# Altium PCB HUMI.PcbDoc
Units mm, origin at the board's own origin, x right, y up, seen from the top; angles counter-clockwise.
Board outline 108 x 64 mm, 2 copper layers (Top Layer, Bottom Layer), stack 1.571 mm thick; 38 components, 37 nets, 146 pads, 0 vias.
Unrouted connection lines stored in the file: 10.
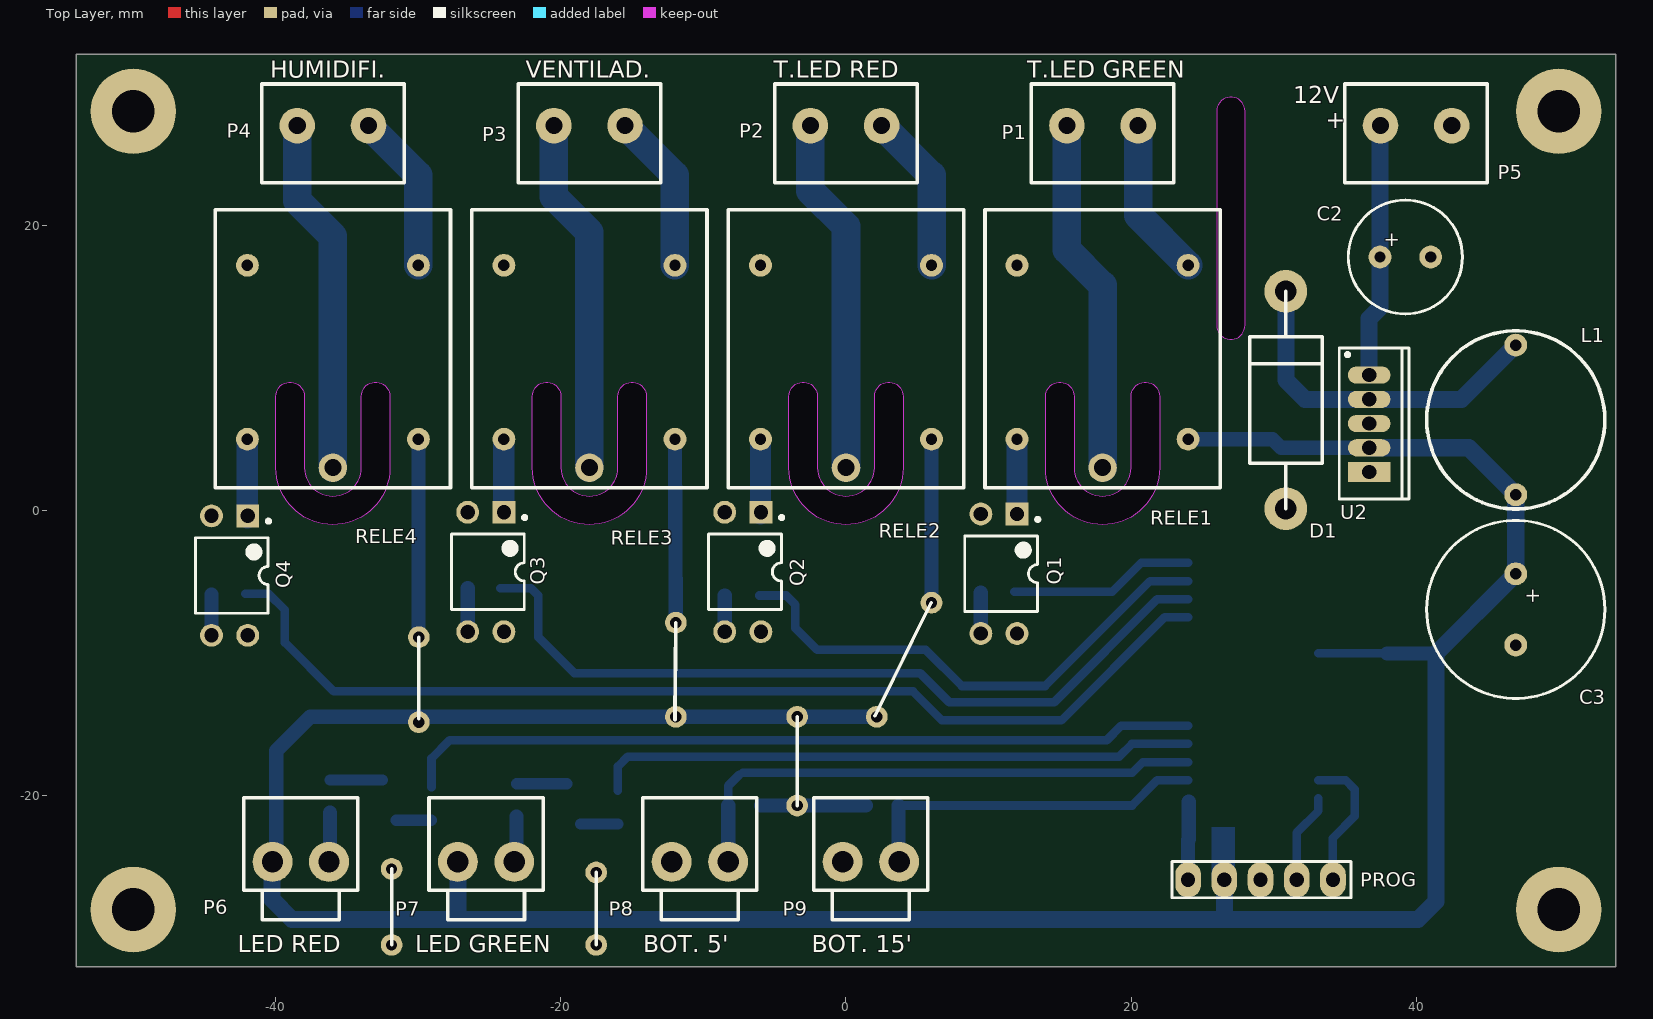
[diagram p0: Top Layer view]
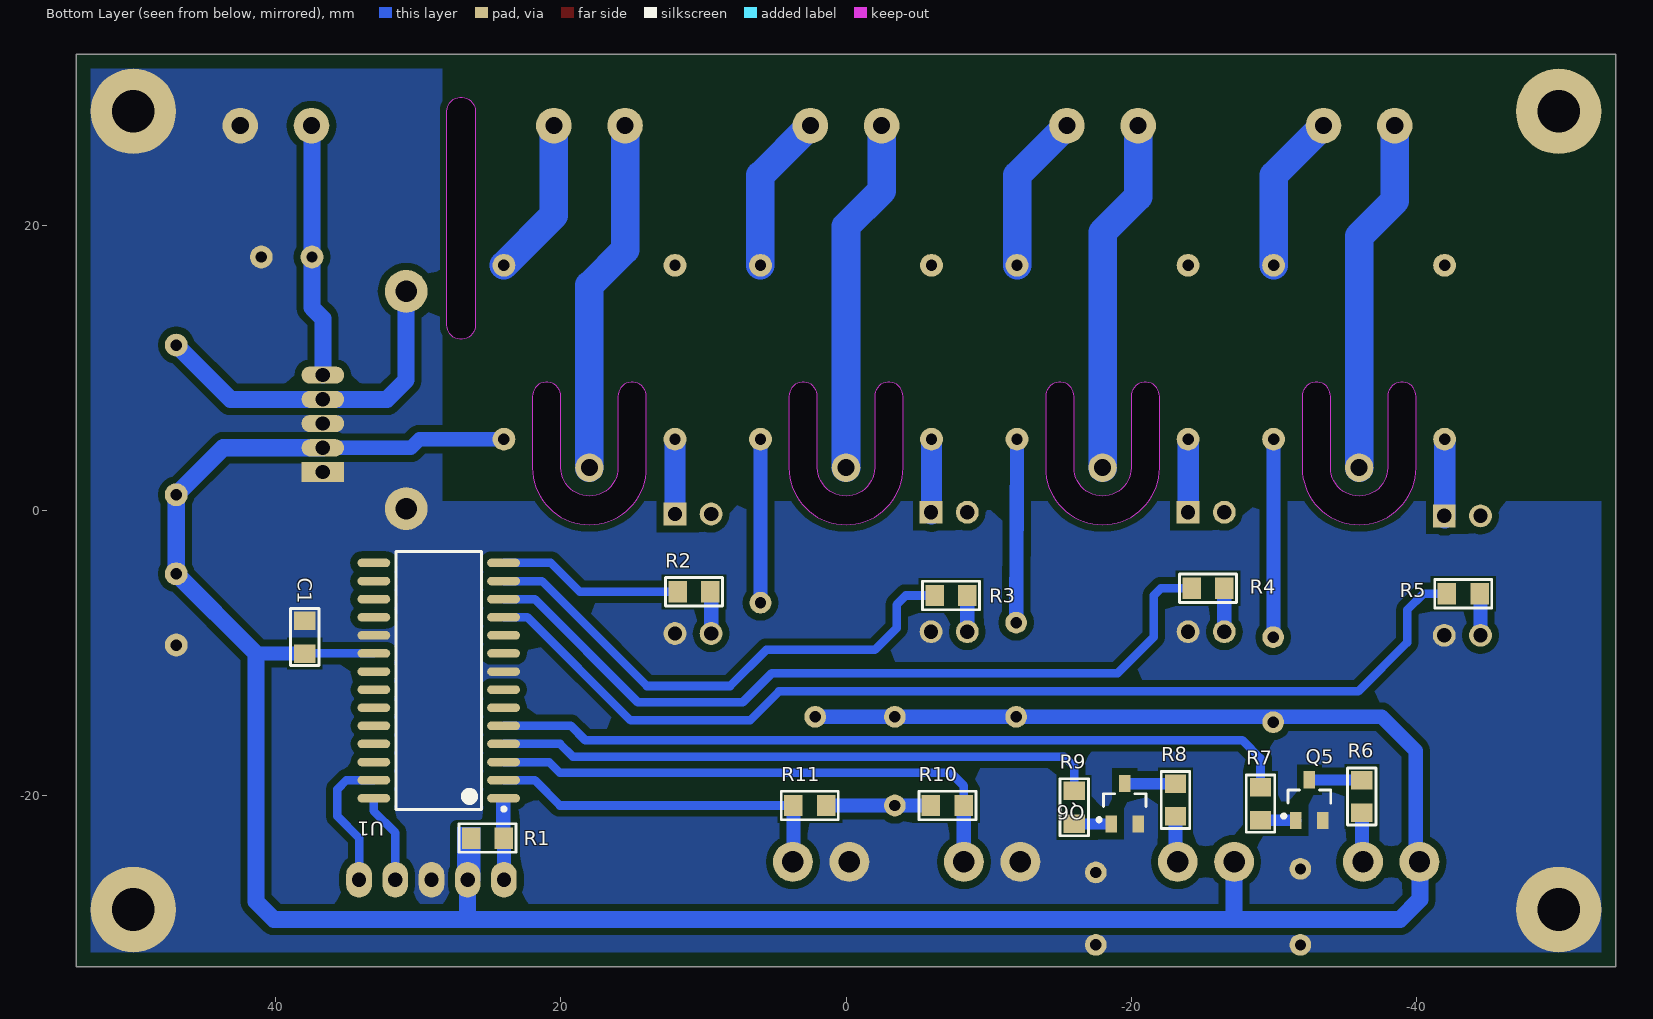
[diagram p1: Bottom Layer view, seen from below]
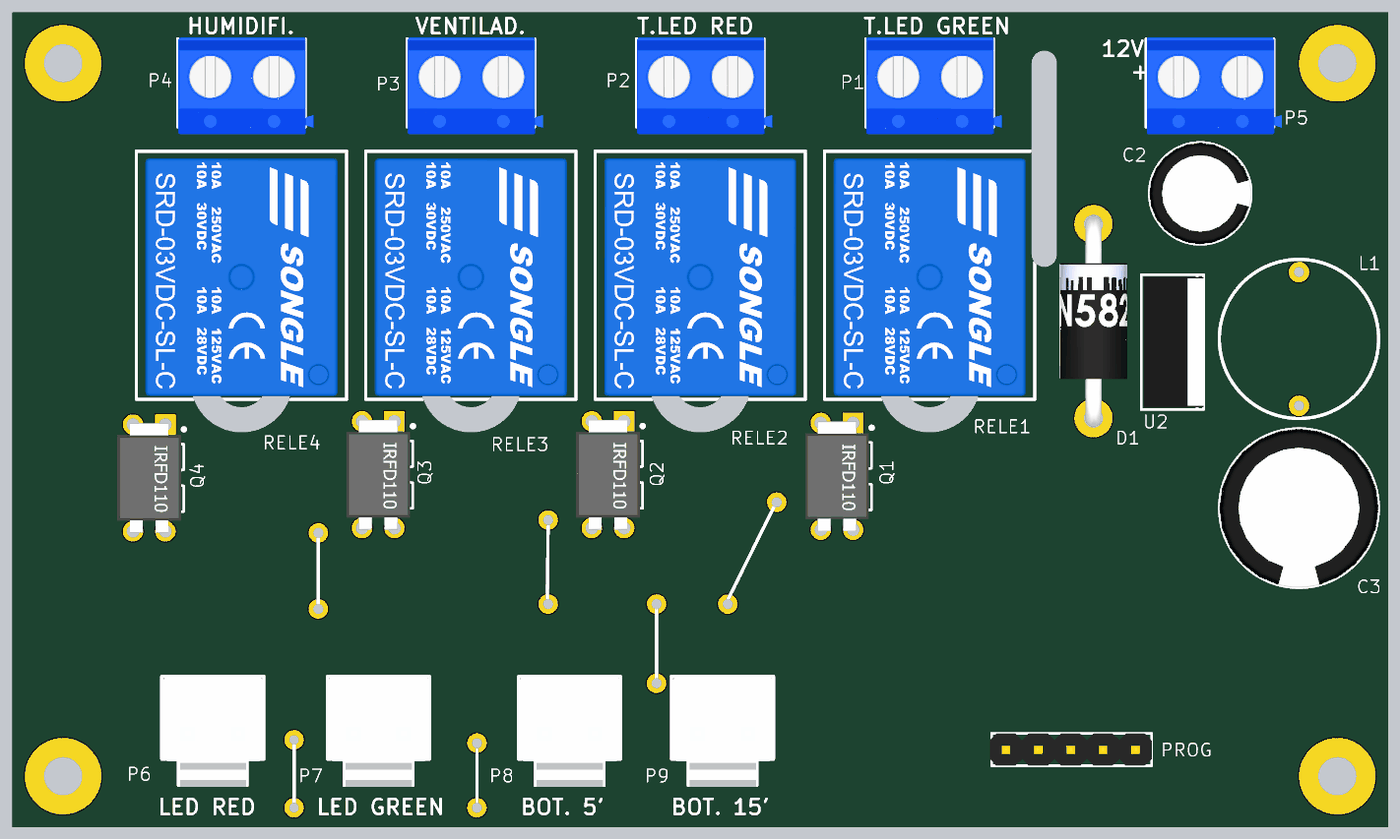
[diagram p2: 3D render of the assembled board from above, using the file's embedded part models]
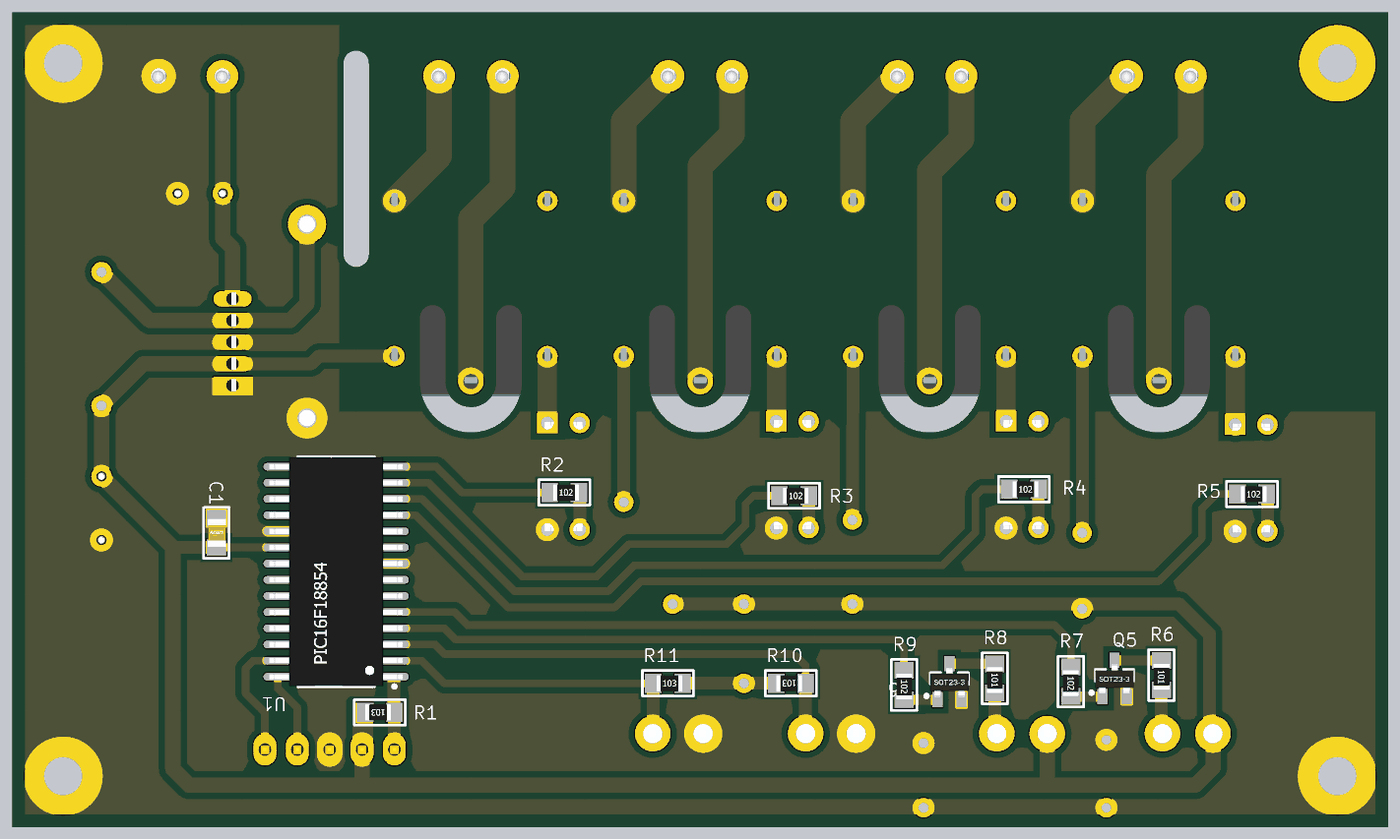
[diagram p3: 3D render of the assembled board from below, using the file's embedded part models]

## Layer stack, top to bottom
Top Solder: solder mask 0.0102, Solder Resist, Dk 3.5
Top Layer: signal copper 0.0356
Dielectric 1: dielectric 1.5, FR-4, Dk 4.8
Bottom Layer: signal copper 0.0356
Bottom Solder: solder mask 0.0102, Solder Resist, Dk 3.5

## Board outline
-54,-32 54,-32 54,32 -54,32
cut-out: 16,3 ccw(c18,3) 20,3 20,8 cw(c21,8) 22,8 22,3 cw(c18,3) 14,3 14,8 cw(c15,8) 16,8
cut-out: -2,3 ccw(c0,3) 2,3 2,8 cw(c3,8) 4,8 4,3 cw(c0,3) -4,3 -4,8 cw(c-3,8) -2,8
cut-out: -20,3 ccw(c-18,3) -16,3 -16,8 cw(c-15,8) -14,8 -14,3 cw(c-18,3) -22,3 -22,8 cw(c-21,8) -20,8
cut-out: -38,3 ccw(c-36,3) -34,3 -34,8 cw(c-33,8) -32,8 -32,3 cw(c-36,3) -40,3 -40,8 cw(c-39,8) -38,8
cut-out: 26,13 ccw(c27,13) 28,13 28,28 ccw(c27,28) 26,28

## Design rules (kind name [scope] priority, off if disabled: settings)
Clearance [All] p1: gap=0.5 ignorepadtopadclearanceinfootprint=FALSE except(0: Arc-Hole Track-Hole SMDPad-Hole THPad-Hole Via-Hole Fill-Hole Poly-Hole Region-Hole Text-Hole)
PlaneConnect [All] p1: planeconnectstyle=Direct reliefexpansion=0.508 reliefentries=4 reliefconductorwidth=0.254 reliefairgap=0.254
PolygonConnect [All] p1: connectstyle=Direct reliefconductorwidth=0.254 reliefentries=4 polygonreliefangle="90 Angle" airgapwidth=0.254
RoomDefinition HUMI [InComponentClass('HUMI')] p1: confinementstyle=ConfineIn formatcopy=TRUE lockcomponents=FALSE outline 77.343,-46.863 401.066,-46.863 401.066,-24.13 77.343,-24.13
RoutingVias [All] p1: holewidth=0.711 width=1.27 viastyle="Through Hole" minholewidth=0.711 minwidth=1.27 maxholewidth=0.711 maxwidth=1.27
SolderMaskExpansion [All] p1: expansion=0.102
Width [All] p1: maxlimit=3 minlimit=0.6 preferedwidth=0.6
29 further rules are at their usual default settings.

## Components (designator, comment, footprint, x,y, rotation, side; value= is the part's Value field where it differs from the comment)
C1 "100NF" CAP.SMD.0805 37.973,-8.89 r270 bottom
C2 "100UFX35V" CAP-ELEC-8X11 39.243,17.78 r0 top
C3 "1000UFX25V" CAP-ELEC-12.5X20 46.99,-6.945 r270 top
D1 "1N5822" "Diode 1N5822" 30.861,7.747 r90 top
L1 "330UHY" "Inductor Radial DR1213" 46.99,6.35 r90 top
P1 "BORNE 2P P=5MM 1.5MM2 15A AZUL XY301V-2P" CON-BOR-X2-5MM 18,27 r180 top
P2 "BORNE 2P P=5MM 1.5MM2 15A AZUL XY301V-2P" CON-BOR-X2-5MM 0,27 r180 top
P3 "BORNE 2P P=5MM 1.5MM2 15A AZUL XY301V-2P" CON-BOR-X2-5MM -18,27 r180 top
P4 "BORNE 2P P=5MM 1.5MM2 15A AZUL XY301V-2P" CON-BOR-X2-5MM -36,27 r180 top
P5 "BORNE 2P P=5MM 1.5MM2 15A AZUL XY301V-2P" CON-BOR-X2-5MM 40,27 r180 top
P6 "CONECTOR PWXXS MA-02 VERTICAL P=3.96MM PW02S" "CONECTOR PWXXS MA-02 VERTICAL P=3.96MM" -38.254,-24.659 r180 top
P7 "CONECTOR PWXXS MA-02 VERTICAL P=3.96MM PW02S" "CONECTOR PWXXS MA-02 VERTICAL P=3.96MM" -25.254,-24.659 r180 top
P8 "CONECTOR PWXXS MA-02 VERTICAL P=3.96MM PW02S" "CONECTOR PWXXS MA-02 VERTICAL P=3.96MM" -10.254,-24.659 r180 top
P9 "CONECTOR PWXXS MA-02 VERTICAL P=3.96MM PW02S" "CONECTOR PWXXS MA-02 VERTICAL P=3.96MM" 1.746,-24.659 r180 top
PROG "In-Serial Circuit Programmer Header" "PIC ICSP" 29.083,-25.908 r0 top
Q1 "Transistor MOSFET N IRFD110" TRA-IRFD110 10.731,-4.445 r270 top
Q2 "Transistor MOSFET N IRFD110" TRA-IRFD110 -7.239,-4.318 r270 top
Q3 "Transistor MOSFET N IRFD110" TRA-IRFD110 -25.273,-4.318 r270 top
Q4 "Transistor MOSFET N IRFD110" TRA-IRFD110 -43.244,-4.572 r270 top
Q5 "BC817-40 TRA.NPN 45V0.5A 0.25W SOT23" NPN.SMD.SOT23 -32.512,-20.32 r90 bottom
Q6 "BC817-40 TRA.NPN 45V0.5A 0.25W SOT23" NPN.SMD.SOT23 -19.558,-20.574 r90 bottom
R1 "10K" RES.SMD.103 25.146,-22.987 r0 bottom
R2 "1K" RES.SMD.102 10.668,-5.715 r180 bottom
R3 "1K" RES.SMD.102 -7.366,-5.969 r180 bottom
R4 "1K 5% 0805 1/8W RES.SMD" RES.SMD.102 -25.4,-5.461 r180 bottom
R5 "1K 5% 0805 1/8W RES.SMD" RES.SMD.102 -43.307,-5.842 r180 bottom
R6 "100E" RES.SMD.101 -36.195,-20.066 r270 bottom
R7 "1K 5% 0805 1/8W RES.SMD" RES.SMD.102 -29.083,-20.574 r270 bottom
R8 "100E" RES.SMD.101 -23.114,-20.32 r270 bottom
R9 "1K 5% 0805 1/8W RES.SMD" RES.SMD.102 -16.002,-20.828 r270 bottom
R10 "10K" RES.SMD.103 -7.112,-20.701 r0 bottom
R11 "10K" RES.SMD.103 2.54,-20.701 r180 bottom
RELE1 "Relay simple inversor 5V 10A" VAR-RELE-5V10A 18,3 r0 top
RELE2 "Relay simple inversor 5V 10A" VAR-RELE-5V10A 0,3 r0 top
RELE3 "Relay simple inversor 5V 10A" VAR-RELE-5V10A -18,3 r0 top
RELE4 "Relay simple inversor 5V 10A" VAR-RELE-5V10A -36,3 r0 top
U1 "PIC16F18854-I/SO 28 SOIC 7KB Flash, 512B RAM, 256B EE, 10b ADC2, DAC, Comp, PWM" SOIC-SO28 28.575,-11.938 r0 bottom
U2 "LM2576T-5.0" LM2576T-5.0 36.703,6.096 r270 top

## Footprints (in the part's own frame and the unit in brackets; to place one, negate y for a bottom-side part, rotate by r counter-clockwise, add the part's x,y. Pads: shape width x height; smd on the part's side, far side on the other; paste and mask are expansions set on the pad)
CAP-ELEC-8X11 [mm] "CAPACITOR ELECTROLITICO 8 X 11"
  round 1.6 hole 0.8: 1(-1.778,0) 2(1.778,0)
  silkscreen extent -4,-4 4,4, body extent -4,-4 4,4, height 11
CAP-ELEC-12.5X20 [mm] "CAPACITOR ELECTROLITICO 12.5 X 20"
  round 1.6 hole 0.8: 1(-2.5,0) 2(2.5,0)
  silkscreen extent -6.25,-6.25 6.25,6.25, body extent -6.25,-6.25 6.25,6.25, height 20
CAP.SMD.0805 [mm] "COG 10% CER.MULT. SMD 0805"
  rect 1.3x1.5 smd: 1(-1.15,0) 2(1.15,0)
  silkscreen extent -2,-1 2,1, body extent -1.1,-0.69 1.1,0.76, height 0.88
CON-BOR-X2-5MM [mm] "Bornera X2 5MM"
  round 2.5 hole 1.2: 1(-2.5,0) 2(2.5,0)
  silkscreen extent -5,-2.92 5,4, body extent -5.65,-3.04 4.95,4.56, height 10
"CONECTOR PWXXS MA-02 VERTICAL P=3.96MM" [mm] "CONECTOR PWXXS VERTICAL P=3.96MM"
  round 2.8 hole 1.5: 1(-1.98,0) 2(1.98,0)
  silkscreen extent -4,-4.5 4,4.06, body extent -3.98,-4.51 3.94,4.19, height 10.7
"Diode 1N5822" [mm] "Diode 1N5822"
  round 3 hole 1.5: A(-7.62,0) K(7.62,0)
  silkscreen extent -7.62,-2.54 7.62,2.54, body extent -8.27,-2.67 8.27,2.65, height 5.66
"Inductor Radial DR1213" [mm] "Inductor Radial DR1213"
  round 1.6 hole 0.8: 1(-5.25,0) 2(5.25,0)
  silkscreen extent -6.25,-6.25 6.25,6.25, body extent -6.25,-6.25 6.25,6.25, height 15.5
LM2576T-5.0 [mm] "LM2576T-5.0 TO220 3A.STEP.DOWN.VOLT.REG."
  oval 1.2x3 hole 1: 1(-3.4,0) 2(-1.7,0) 3(0,0) 4(1.7,0)
  rect 1.4x3 hole 1: 5(3.4,0)
  silkscreen extent -5.3,-2.1 5.3,2.8, body extent -5.11,-1.91 5.09,2.8, height 15.4
NPN.SMD.SOT23 [mm] "Transistor NPN 0.25W SOT23"
  rect 1.2x0.8 smd: 1(-1.425,0.95) 2(-1.425,-0.95) 3(1.425,0)
  silkscreen extent -1.25,-1.5 0.7,1.93, body extent -1.37,-1.52 1.27,1.52, height 0.94
"PIC ICSP" [mm] "In-Serial Circuit Programmer Header"
  oval 1.8x2.5 hole 1: 1(-5.08,0) 2(-2.54,0) 3(0,0) 4(2.54,0) 5(5.08,0)
  silkscreen extent -6.22,-1.27 6.35,1.27, body extent -6.35,-1.27 6.35,1.27, height 9.54
RES.SMD.101 [mm] "5% 0805 1/8W RES.SMD"
  rect 1.3x1.5 smd: 1(-1.15,0) 2(1.15,0)
  silkscreen extent -2,-1 2,1, body extent -0.87,-0.62 1.13,0.63, height 0.48
RES.SMD.102 [mm] "5% 0805 1/8W RES.SMD"
  rect 1.3x1.5 smd: 1(-1.15,0) 2(1.15,0)
  silkscreen extent -2,-1 2,1, body extent -0.87,-0.62 1.13,0.63, height 0.48
RES.SMD.103 [mm] "5% 0805 1/8W RES.SMD"
  rect 1.3x1.5 smd: 1(-1.15,0) 2(1.15,0)
  silkscreen extent -2,-1 2,1, body extent -0.87,-0.62 1.13,0.63, height 0.48
SOIC-SO28 [mm] "PIC16F18854 SOIC, 28-Leads, Body 17.9x7.5mm, Pitch 1.27mm,"
  oval 2.3x0.6 smd: 1(-4.55,8.255) 2(-4.55,6.985) 3(-4.55,5.715) 4(-4.55,4.445) 5(-4.55,3.175) 6(-4.55,1.905) 7(-4.55,0.635) 8(-4.55,-0.635) 9(-4.55,-1.905) 10(-4.55,-3.175) 11(-4.55,-4.445) 12(-4.55,-5.715) 13(-4.55,-6.985) 14(-4.55,-8.255) 15(4.55,-8.255) 16(4.55,-6.985) 17(4.55,-5.715) 18(4.55,-4.445) 19(4.55,-3.175) 20(4.55,-1.905) 21(4.55,-0.635) 22(4.55,0.635) 23(4.55,1.905) 24(4.55,3.175) 25(4.55,4.445) 26(4.55,5.715) 27(4.55,6.985) 28(4.55,8.255)
  silkscreen extent -4.7,-9.05 3,9.14, body extent -5.24,-9 5.24,9, height 1.75
TRA-IRFD110 [mm] "TRA-IRFD110"
  rect 1.6x1.6 hole 1: 1(-4.191,1.27)
  round 1.6 hole 1: 2(-4.191,-1.27) 3(4.191,-1.27) 4(4.191,1.27)
  silkscreen extent -3.94,-2.4 2.64,2.85, body extent -4.3,-2.5 4.3,2.5, height 4.62
VAR-RELE-5V10A [mm] "Relay 5V 10A"
  round 1.6 hole 0.8: 1(-6,2) 2(6,2) 4(6,14.2) 5(-6,14.2)
  round 2 hole 1.2: 3(0,0)
  silkscreen extent -8.25,-1.4 8.25,18.1, body extent -7.54,-1.14 7.54,17.55, height 14.94

## Part data
C1: library part "Capacitor 100NFX50V X7R 10% CER.MULT. SMD 0805", "100NFX50V X7R 10% CER.MULT. SMD 0805", COD. ELEMON=CA3279774, COD. FV=CE.CAP.0008
C2: library part "Capacitor Electrolitico 100UFX35V 85°C 8x11 ELE.RAD AISHI", "100UFX35V 85°C 8x11 ELE.RAD AISHI", COD. ELEMON=CA3609372, COD. FV=CE.CAP.0009
C3: library part "Capacitor Electrolitico 1000UFX25V 85°C 12.5X20 ELE.RAD AISHI", "1000UFX25V 85°C 12.5X20 ELE.RAD AISHI", COD. ELEMON=CA3609291, COD. FV=CE.CAP.0010
D1: library part "Diodo Schottky 1N5822 3A 40V", "Diodo Schottky 1N5822 3A 40V", COD. FV=CE.DIO.0002
L1: library part "Inductor Radial 330UHY 0.3R 1.4A RAD. 15.5X15.5MM", "330UHY 0.3R 1.4A RAD. 15.5X15.5MM", COD. ELEMON=FI1537220, COD. FV=CE.IND.0002
Q5 Q6: library part "Transistor BC817-40 TRA.NPN 45V0.5A 0.25W SOT23", COD. ELEMON=TR1723020, COD. FV=CE.TRA.0002
R1 R10 R11: library part "Resistencia 10K 5% 0805 1/8W", "10K 5% 0805 1/8W RES.SMD", COD. ELEMON=RS3896245, COD. FV=CE.RES.0014
R2 R3: library part "Resistencia 1K 5% 0805 1/8W", "1K 5% 0805 1/8W RES.SMD", COD. ELEMON=RS3896185, COD. FV=CE.RES.0012
R4 R5 R7 R9: library part "Resistencia 1K 5% 0805 1/8W", COD. ELEMON=RS3896185, COD. FV=CE.RES.0012
R6 R8: library part "Resistencia 100E 5% 0805 1/8W", "100E 5% 0805 1/8W RES.SMD", COD. ELEMON=RS3896125, COD. FV=CE.RES.0011
RELE1 RELE2 RELE3 RELE4: library part "VAR-RELE-5V Relay simple inversor 5V 10A", COD. SYC=NT73-05
U1: "PIC16F18854-I/SO", COD. ELEMON=MI2986745, COD. FV=CE.MIC.0003
U2: library part "LM2576T-5.0 TO220 3A.STEP.DOWN.VOLT.REG.", "LM2576T-5.0 TO220 3A.STEP.DOWN.VOLT.REG.", COD. ELEMON=CI2707258H, COD. FV=CE.SEM.0002
P1 P2 P3 P4 P5: COD. ELEMON=BO5812000
P6 P7 P8 P9: COD. ELEMON=CO5052000, COD. FV=CE.CON.0012
PROG: COD. ELEMON=CO4900906, COD. FV=CE.CON.0017
Q1 Q2 Q3 Q4: COD. FV=CE.TRA.0003

## Free pads (board coordinates)
  round 6 hole 3: 0(-50,-28) 0(-50,28) 0(50,-28) 0(50,28)
  round 1.524 hole 0.8: 2(2.159,-14.478) 3(6,-6.477) 4(-11.938,-7.874) 5(-11.938,-14.478) 6(-29.972,-8.89) 7(-29.972,-14.859) 8(-3.429,-20.701) 9(-3.429,-14.478) 10(-17.526,-30.48) 11(-17.526,-25.4)
  round 1.524 hole 0.762: 12(-31.877,-30.48) 13(-31.877,-25.146)

## Nets (pads, with @x,y where several pads share a name; then routed paths per layer and width w, separated by ;. In a path a pad name is that pad's centre, name@x,y a point inside that pad or via, vN(x,y) a via of type N, cw(c..) or ccw(c..) an arc to the next point about the centre after c; other vN are vias at no path point)
5V: C1.2 C3.1 L1.1 P6.2 P7.2 pad.2 pad.3 pad.4 pad.5 pad.6 pad.7 pad.8 pad.9 PROG.2 R1.2 R10.2 R11.2 RELE1.2 RELE2.2 RELE3.2 RELE4.2 U1.20 U2.4 | length 253.5
  Bottom Layer w0.6: pad.8@-3.937,-20.828 pad.8@-3.81,-20.701 ; U1.20 37.966,-10.033 C1.2
  Bottom Layer w1: P6.2@-39.98,-25.294 -39.98,-16.866 -37.592,-14.478 pad.2 ; pad.6@-30,-8.89 RELE4.2 ; RELE3.2 pad.4 ; R10.2 -3.81,-20.701 R11.2 ; pad.3 RELE2.2 ; RELE1.2 29.925,5 30.529,4.396 U2.4 ; C1.2 41.395,-10.04
  Bottom Layer w1.2: P6.2@-40.259,-24.511 -40.259,-27.305 -38.862,-28.702 -27.234,-28.702 P7.2 ; -27.305,-28.702 26.543,-28.702 ; PROG.2 26.543,-28.702 ; U2.4 43.694,4.396 L1.1 C3.1 41.395,-10.04 41.395,-27.439 40.132,-28.702 26.543,-28.702
12V: C2.1 P5.2 U2.1 | length 17.8
  Bottom Layer w0.254: P5.2@37.465,26.965 P5.2
  Bottom Layer w1.2: U2.1 36.703,13.462 37.465,14.224 C2.1 P5.2@37.465,26.965
BUT-1: P8.1 R10.1 U1.3 | length 38.1
  Bottom Layer w0.254: P8.1@-8.274,-24.73 P8.1@-8.255,-24.711
  Bottom Layer w0.6: R10.1 -8.262,-19.311 -7.493,-18.542 ; -7.239,-18.415 20.066,-18.415 20.828,-17.653 U1.3
  Bottom Layer w1: P8.1@-8.255,-24.711 R10.1@-8.255,-20.701
BUT-2: P9.1 R11.1 U1.2 | length 25.1
  Bottom Layer w0.6: P9.1@3.683,-24.616 P9.1 ; R11.1@3.683,-20.701 20.066,-20.701 21.844,-18.923 U1.2
  Bottom Layer w1: P9.1@3.683,-24.616 R11.1@3.683,-20.701
GND: C1.1 C2.2 C3.2 D1.A P5.1 P8.2 P9.2 pad.0@50,28 pad.0@50,-28 pad.0@-50,-28 pad.10 pad.11 pad.12 pad.13 PROG.3 Q1.4 Q2.4 Q3.4 Q4.4 Q5.2 Q6.2 U1.8 U1.19 U2.3 U2.5
LED-ROJO: R7.1 U1.5 | length 56.1
  Bottom Layer w0.6: R7.1 -29.083,-17.399 -27.813,-16.129 18.288,-16.129 19.304,-15.113 U1.5
LED-VERDE: R9.1 U1.4 | length 42.4
  Bottom Layer w0.6: R9.1 -16.002,-17.959 -15.315,-17.272 19.177,-17.272 20.066,-16.383 U1.4
NetD1_K: D1.K L1.2 U2.2 | length 24.7
  Bottom Layer w1.2: D1.K@30.353,15.367 30.861,14.859 30.861,9.144 32.209,7.796 U2.2 43.186,7.796 L1.2
NetP1_1: P1.1 RELE1.4 | length 11.2
  Bottom Layer w2: P1.1 20.5,20.7 RELE1.4
NetP1_2: P1.2 RELE1.3 | length 25
  Bottom Layer w2: P1.2 15.5,18.282 18,15.782 RELE1.3
NetP2_1: P2.1 RELE2.4 | length 11.2
  Bottom Layer w2: P2.1 6,23.5 RELE2.4
NetP2_2: P2.2 RELE2.3 | length 25
  Bottom Layer w2: P2.2 -2.5,22.439 0,19.939 RELE2.3
NetP3_1: P3.1 RELE3.4 | length 11.2
  Bottom Layer w2: P3.1 -12,23.5 RELE3.4
NetP3_2: P3.2 RELE3.3 | length 25
  Bottom Layer w2: P3.2 -20.5,22.024 -18,19.524 RELE3.3
NetP4_1: P4.1 RELE4.4 | length 11.2
  Bottom Layer w2: P4.1 -30,23.5 RELE4.4
NetP4_2: P4.2 RELE4.3 | length 25
  Bottom Layer w2: P4.2 -38.5,21.736 -36,19.236 RELE4.3
NetP6_1: P6.1 R6.2 | length 3.5
  Bottom Layer w0.6: P6.1 P6.1@-36.195,-24.58
  Bottom Layer w1: P6.1@-36.195,-24.58 R6.2
NetP7_1: P7.1 R8.2 | length 3.3
  Bottom Layer w0.254: P7.1@-23.274,-24.73 P7.1@-23.114,-24.57
  Bottom Layer w1: P7.1@-23.114,-24.57 R8.2
NetPROG_1: PROG.1 R1.1 U1.1 | length 5.8
  Bottom Layer w0.254: R1.1@23.996,-23.114 R1.1@24.047,-23.063
  Bottom Layer w1: PROG.1@23.876,-26.162 23.996,-26.042 R1.1@23.996,-23.114 ; R1.1@24.047,-23.063 U1.1@24.047,-20.447
NetPROG_4: PROG.4 U1.28 | length 6.6
  Bottom Layer w0.6: PROG.4@31.623,-26.162 31.623,-22.606 33.147,-21.082 U1.28@33.147,-20.193
NetPROG_5: PROG.5 U1.27 | length 10.1
  Bottom Layer w0.6: U1.27 35.052,-18.923 35.687,-19.558 35.687,-21.463 34.163,-22.987 PROG.5@34.163,-26.162
NetQ1_1: Q1.1 Q1.2 RELE1.1 | length 5.3
  Bottom Layer w1.5: Q1.1@12,-0.254 RELE1.1
NetQ1_3: Q1.3 R2.2 | length 2.9
  Bottom Layer w0.6: R2.2@9.461,-5.772 R2.2
  Bottom Layer w1: Q1.3 R2.2@9.461,-5.772
NetQ2_1: Q2.1 Q2.2 RELE2.1 | length 5.3
  Bottom Layer w1.5: Q2.1@-6,-0.254 RELE2.1
NetQ2_3: Q2.3 R3.2 | length 2.5
  Bottom Layer w0.6: R3.2 R3.2@-8.509,-5.976
  Bottom Layer w1: Q2.3 R3.2@-8.509,-5.976
NetQ3_1: Q3.1 Q3.2 RELE3.1 | length 5.1
  Bottom Layer w1.5: Q3.1@-24,-0.127 RELE3.1
NetQ3_3: Q3.3 R4.2 | length 3.1
  Bottom Layer w0.6: R4.2 R4.2@-26.543,-5.468
  Bottom Layer w1: Q3.3 R4.2@-26.543,-5.468
NetQ4_1: Q4.1 Q4.2 RELE4.1 | length 5.5
  Bottom Layer w1.5: Q4.1@-42,-0.508 RELE4.1
NetQ4_3: Q4.3 R5.2 | length 2.9
  Bottom Layer w0.6: R5.2@-44.514,-5.899 R5.2
  Bottom Layer w1: Q4.3 R5.2@-44.514,-5.899
NetQ5_1: Q5.1 R7.2 | length 2.5
  Bottom Layer w0.6: R7.2@-29.104,-21.745 R7.2
  Bottom Layer w0.8: Q5.1 R7.2@-29.104,-21.745
NetQ5_3: Q5.3 R6.1 | length 3.8
  Bottom Layer w0.254: R6.1@-36.287,-18.824 R6.1
  Bottom Layer w0.6: Q5.3@-32.533,-18.916 Q5.3
  Bottom Layer w0.8: R6.1 Q5.3@-32.533,-18.916
NetQ6_1: Q6.1 R9.2 | length 2.6
  Bottom Layer w0.6: R9.2@-16.023,-21.999 R9.2
  Bottom Layer w0.8: Q6.1 R9.2@-16.023,-21.999
NetQ6_3: Q6.3 R8.1 | length 3.6
  Bottom Layer w0.6: Q6.3@-19.579,-19.17 Q6.3
  Bottom Layer w0.8: R8.1 Q6.3@-19.579,-19.17
RELE1: R2.1 U1.14 | length 13
  Bottom Layer w0.6: R2.1 18.669,-5.715 20.701,-3.683 U1.14
RELE2: R3.1 U1.13 | length 36.8
  Bottom Layer w0.6: R3.1@-6.089,-5.969 -4.191,-5.969 -3.556,-6.604 -3.556,-8.255 -2.032,-9.779 5.588,-9.779 8.128,-12.319 13.97,-12.319 21.336,-4.953 U1.13
RELE3: R4.1 U1.12 | length 56.3
  Bottom Layer w0.6: R4.1 -22.098,-5.461 -21.59,-5.969 -21.59,-8.89 -19.05,-11.43 5.207,-11.43 7.239,-13.462 14.605,-13.462 21.844,-6.223 U1.12
RELE4: R5.1 U1.11 | length 74.2
  Bottom Layer w0.6: R5.1 -40.513,-5.842 -39.37,-6.985 -39.37,-9.271 -35.941,-12.7 4.699,-12.7 6.731,-14.732 15.113,-14.732 22.352,-7.493 U1.11
pads on no net: RELE1.5 RELE2.5 RELE3.5 RELE4.5 U1.6 U1.7 U1.9 U1.10 U1.15 U1.16 U1.17 U1.18 U1.21 U1.22 U1.23 U1.24 U1.25 U1.26

## Polygon pours and split planes (outlines as drawn)
GND on Bottom Layer "Top Layer-No Net" (solid, pour order 1): -53,31 53,31 53,-31 -53,-31

## Other copper
Bottom Layer:
  rectangle net 5V: 25.654,-26.035 27.305,-22.225
  pour cut-out: 28.343,31.986 28.343,0.635 -54,0.635 -54,30 -52.014,31.986

## Silkscreen, mask and mechanical layers (free items; w line width, h text height)
Top Overlay:
  lines w0.254: -31.877,-30.48 -31.877,-25.146 ; -29.972,-14.605 -29.972,-8.89 ; -17.526,-30.48 -17.526,-25.4 ; -12,-14.67 -11.938,-7.874 ; -3.429,-20.701 -3.429,-14.478 ; 2.029,-14.414 5.969,-6.477
  text "HUMIDIFI." at -40.386,30.353 h1.2
  text "VENTILAD." at -22.479,30.353 h1.2
  text "T.LED RED" at -5.08,30.353 h1.2
  text "T.LED GREEN" at 12.7,30.353 h1.2
  text "12V" at 31.369,28.575 h1.2
  text "+" at 33.655,26.797 h1.2
  text "LED RED" at -42.672,-30.988 h1.2
  text "LED GREEN" at -30.226,-30.988 h1.2
  text "BOT. 5'" at -14.224,-30.988 h1.2
  text "BOT. 15'" at -2.413,-30.988 h1.2
Mechanical 1:
  the board outline again, w0.254
Mechanical 13:
  lines w0.254: -40,3 ccw(c-36,3) -32,3 -32,8 ccw(c-33,8) -34,8 -34,3 cw(c-36,3) -38,3 -38,8 ccw(c-39,8) -40,8 -40,3 ; -22,3 ccw(c-18,3) -14,3 -14,8 ccw(c-15,8) -16,8 -16,3 cw(c-18,3) -20,3 -20,8 ccw(c-21,8) -22,8 -22,3 ; -4,3 ccw(c0,3) 4,3 4,8 ccw(c3,8) 2,8 2,3 cw(c0,3) -2,3 -2,8 ccw(c-3,8) -4,8 -4,3 ; 14,3 ccw(c18,3) 22,3 22,8 ccw(c21,8) 20,8 20,3 cw(c18,3) 16,3 16,8 ccw(c15,8) 14,8 14,3 ; 26,13 ccw(c27,13) 28,13 28,28 ccw(c27,28) 26,28 26,13

## Dimensions
-54,32 to 54,32 on Mechanical 13
-54,32 to -54,-32 on Mechanical 13

## Text inside footprints (layer, text, board x,y; h text height)
C2: Top Overlay "+" at 37.719,18.542 h1
C3: Top Overlay "+" at 47.752,-5.421 h1 r270